# Altium PCB PCBB_BUZZ.PcbDoc
Units mil, origin at the board's own origin, x right, y up, seen from the top; angles counter-clockwise.
Board outline 6000 x 4000 mil, 2 copper layers (Top Layer, Bottom Layer); 9 components, 7 nets, 26 pads, 0 vias.
Unrouted connection lines stored in the file: 18.
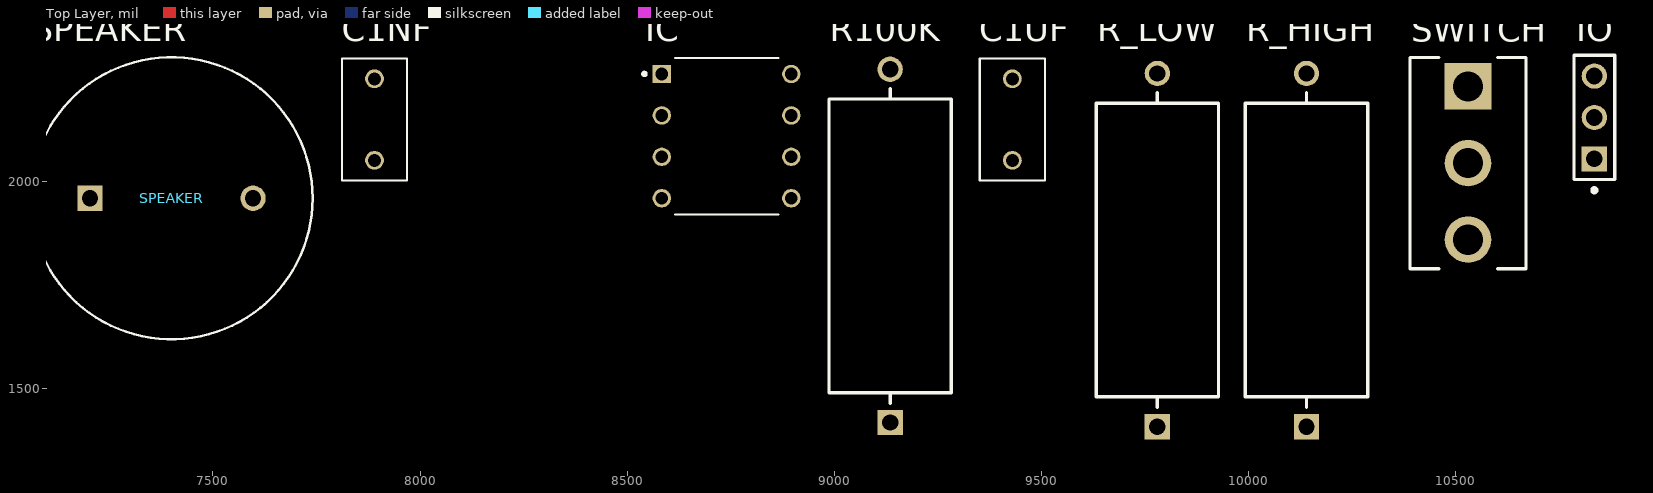
[diagram p0: Top Layer view]
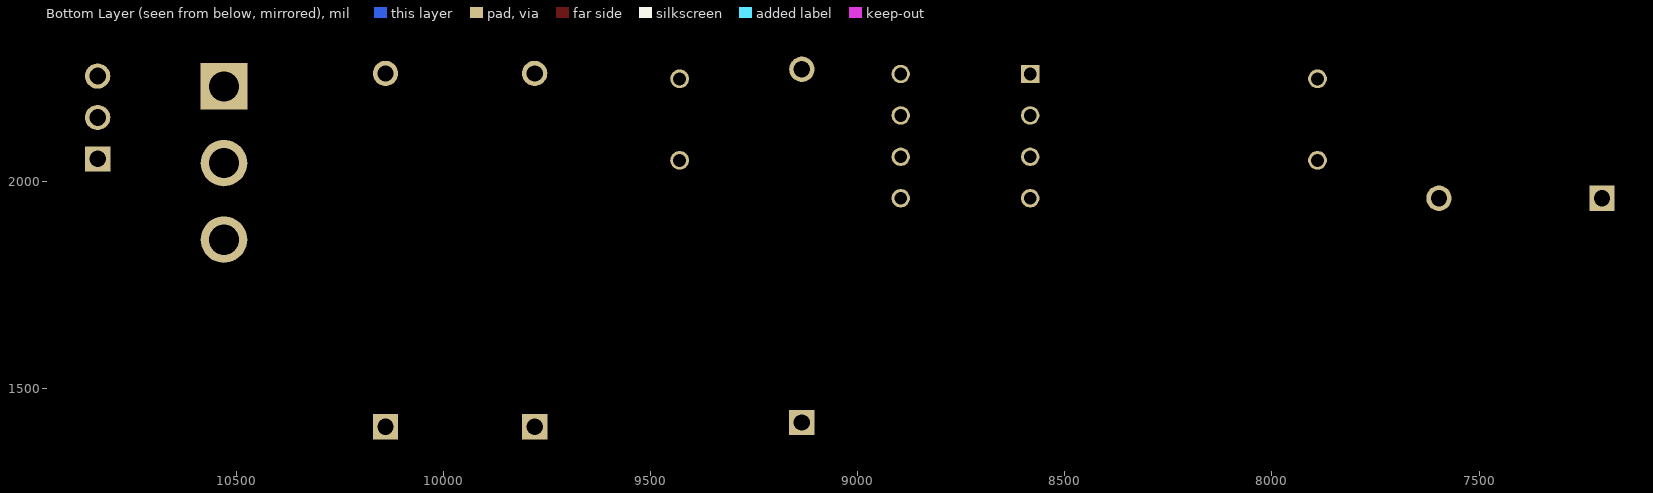
[diagram p1: Bottom Layer view, seen from below]

## Layer stack, top to bottom
Top Solder: solder mask 0.4, Solder Resist, Dk 3.5
Top Layer: signal copper 1.4
Dielectric 1: dielectric 12.6, FR-4, Dk 4.8
Bottom Layer: signal copper 1.4
Bottom Solder: solder mask 0.4, Solder Resist, Dk 3.5

## Board outline
1000,1000 7000,1000 7000,5000 1000,5000

## Design rules (kind name [scope] priority, off if disabled: settings)
Clearance [All] p1: gap=10 ignorepadtopadclearanceinfootprint=FALSE except(0: Arc-Hole Track-Hole SMDPad-Hole THPad-Hole Via-Hole Fill-Hole Poly-Hole Region-Hole Text-Hole)
PolygonConnect [All] p1: connectstyle=Relief reliefconductorwidth=10 reliefentries=4 polygonreliefangle="90 Angle" airgapwidth=10
RoomDefinition SCHE_BUZZ [InComponentClass('SCHE_BUZZ')] p1: confinementstyle=ConfineIn formatcopy=TRUE lockcomponents=FALSE outline 7045,1065 10900,1065 10900,2415 7045,2415
RoutingVias [All] p1: holewidth=28 width=50 viastyle="Through Hole" minholewidth=28 minwidth=50 maxholewidth=28 maxwidth=50
SolderMaskExpansion [All] p1: expansion=4 istentingtop=FALSE
Width [All] p1: maxlimit=10 minlimit=10 preferedwidth=10
30 further rules are at their usual default settings.

## Components (designator, comment, footprint, x,y, rotation, side; value= is the part's Value field where it differs from the comment)
C1NF "1n" CAPRB500W50L750T400H800 7890,2150 r90 top
C1UF "1u" CAPRB500W50L750T400H800 9430,2150 r90 top
IC "NE555P" DIP794W45P254L959H508Q8 8740,2110 r0 top
IO "22-28-4033" MOLX-22-28-4033_V 10835,2155 r90 top
R100K "100K" FP-AC05000003909JAC00-0 9135,1845 r90 top value=39Ω
R_HIGH "499K" FP-AC05000003909JAC00-0 10140,1835 r90 top value=39Ω
R_LOW "100K" FP-AC05000003909JAC00-0 9780,1835 r90 top value=39Ω
SPEAKER "PS1720P02" FP-PS1720P02-MFG 7400,1960 r0 top
SWITCH "A101SYCB04" FP-A101SYCB04-MFG 10530,2045 r0 top

## Footprints (in the part's own frame and the unit in brackets; to place one, negate y for a bottom-side part, rotate by r counter-clockwise, add the part's x,y. Pads: shape width x height; smd on the part's side, far side on the other; paste and mask are expansions set on the pad)
CAPRB500W50L750T400H800 [mm]
  round 1.15 hole 0.8: 1(-2.5,0) 2(2.5,0)
  silkscreen extent -3.75,-2 3.75,2
DIP794W45P254L959H508Q8 [mm]
  rect 1.13x1.13 hole 0.78: 1(-3.97,3.81)
  round 1.13 hole 0.78: 2(-3.97,1.27) 3(-3.97,-1.27) 4(-3.97,-3.81) 5(3.97,-3.81) 6(3.97,-1.27) 7(3.97,1.27) 8(3.97,3.81)
  silkscreen extent -5.13,-4.79 3.17,4.79
FP-A101SYCB04-MFG [mil]
  rect 112.37x112.37 hole 73 paste-39370.1 mask+0: 1(0,185)
  round 112.37 hole 73 paste-39370.1 mask+0: 2(0,0) 3(0,-185)
  silkscreen extent -140,-255 140,255, body extent -144,-259 144,259, height 10
FP-AC05000003909JAC00-0 [mm]
  rect 1.55x1.55 hole 1 paste-1000 mask+0: 1(-10.83,0)
  round 1.55 hole 1 paste-1000 mask+0: 2(10.83,0)
  silkscreen extent -9.65,-3.75 9.65,3.75, body extent -11.71,-3.85 11.71,3.85, height 0.25
FP-PS1720P02-MFG [mm]
  rect 1.55x1.55 hole 1 paste-1000 mask+0: 1(-5,0)
  round 1.55 hole 1 paste-1000 mask+0: 2(5,0)
  silkscreen extent -8.65,-8.65 8.65,8.65, body extent -8.75,-8.75 8.75,8.75, height 0.25
MOLX-22-28-4033_V [mm] "THD, 3-Leads, Body 7.62x2.49mm, Pitch 2.54mm"
  rect 1.55x1.55 hole 1.02: 1(-2.54,0)
  round 1.55 hole 1.02: 2(0,0) 3(2.54,0)
  silkscreen extent -4.58,-1.24 3.81,1.24, body extent -3.81,-1.24 3.81,1.24, height 8.38

## Part data
C1NF: library part FK22X7R2A105KN000, Package=None, Check_prices=https://www.snapeda.com/parts/FK22X7R2A105KN000/TDK/view-part/?ref=eda, Digi-Key_Part_Number=445-FK22X7R2A105KN000-ND, MF=TDK, MP=FK22X7R2A105KN000, Purchase-URL=https://pricing.snapeda.com/search/part/FK22X7R2A105KN000/?ref=eda, SnapEDA_Link=https://www.snapeda.com/parts/FK22X7R2A105KN000/TDK/view-part/?ref=snap
C1UF: library part FK22X7R2A105KN000, "Cap Ceramic 1uF 100V X7R 10% Radial 5mm 125Â°C Tape and Box", Package=None, Check_prices=https://www.snapeda.com/parts/FK22X7R2A105KN000/TDK/view-part/?ref=eda, Digi-Key_Part_Number=445-FK22X7R2A105KN000-ND, MF=TDK, MP=FK22X7R2A105KN000, Purchase-URL=https://pricing.snapeda.com/search/part/FK22X7R2A105KN000/?ref=eda, SnapEDA_Link=https://www.snapeda.com/parts/FK22X7R2A105KN000/TDK/view-part/?ref=snap
IC: Package=None, Availability=Unavailable, MP=NE555P, Price=None
IO: library part CMP-1676-00001-5, "Male Header, Pitch 2.54 mm, 1 x 3 Position, Height 8.38 mm, Tail Length 3.18 mm, RoHS, Bulk", Colour=Black, Current Rating="4 A", Manufacturer=Molex, Max Operating Temperature="75 degC", Min Operating Temperature="0 degC", Package Quantity=1, Voltage Rating="250 V", ComponentLink1Description="Manufacturer URL", ComponentLink1URL=http://www.molex.com/, ComponentLink2Description=Datasheet, ComponentLink2URL=http://www.molex.com/pdm_docs/sd/022284033_sd.pdf, Contact Finish=Gold, Contact Material=Brass, Contact Plating=Gold, DatasheetVersion="Rev. G, 01/2012", Height="8.38 mm", Lead Pitch="0.1 inch", Length="7.62 mm", Mount="Through Hole", Mounting Technology="Through Hole", PackageDescription="Male Header, Pitch 2.54 mm, 1 x 3 Position, Height 8.38 mm, Tail Length 3.18 mm", PackageReference=22-28-4033, Packaging=Bulk, Pins=3, REACH SVHC=Unknown, RoHSCompliant=true, Rows=1
R100K R_HIGH R_LOW: library part CMP-02408-000001-1, Manufacturer=Vishay, Manufacturer Part Number=AC05000003909JAC00, Package=0, Power Rating=5W, Resistance=39Ω, Temperature="-55°C to +250°C", Temperature Range High=+250°C, Temperature Range Low=-55°C, Tolerance=5%, Automotive=No, Automotive Grade=NA, Category=Res, ComponentLink2Description=Datasheet, ComponentLink2URL=http://www.vishay.com/docs/28730/acac-at.pdf, Composition=Wirewound, Device Class L1="Passive Components", Device Class L2=Resistors, Device Class L3="Through-Hole Resistors", Digikey Description="RES 39 OHM 5W 5% AXIAL", Height=7.5mm, Ipc Land Pattern Name=RESAD2166W100L1800D750, Lead Free=Yes, Mouser Description="Res Wirewound 39 Ohm 5% 5W -80ppm/°C to -10ppm/°C Conformal AXL Thru-Hole Ammo Pack", Octopart=https://octopart.com/ac05000003909jac00-vishay-39746279, RoHS=TRUE, Series=AC
SPEAKER: library part CMP-08413-000001-1, "AUDIO PIEZO TRANSDUCER 30V TH", Frequency=2kHz, Manufacturer="TDK Corporation", Package=0, Temperature="-10°C to +70°C", Temperature Range High=+70°C, Temperature Range Low=-10°C, Automotive=No, Category=Speak, ComponentLink2Description=Datasheet, ComponentLink2URL=https://product.tdk.com/info/en/catalog/datasheets/piezoelectronic_buzzer_ps_en.pdf, Device Class L1=Electromechanical, Device Class L2="Audio Products", Device Class L3=Buzzers, Digikey Description="AUDIO PIEZO TRANSDUCER 30V TH", Height=8.3mm, Lead Free=Yes, Manufacturer Part Number=PS1720P02, Mouser Description="Audio Indicators & Alerts Round 17mmx8mm 2 kHz Vin=3V", Octopart=https://octopart.com/ps1720p02-tdk-154429, RoHS=TRUE, Standoff Height=0.5mm
SWITCH: library part CMP-03408-000017-1, "SWITCH TOGGLE SPDT 0.4VA 20V", Actuator Color=Chrome, Contact Current Rating=400mA, Contact Resistance=10mR, Flammability Rating="UL94 V-1", Insulation Resistance=30MR, Max Operating Temperature=85°C, Max Voltage Rating (AC)=20V, Min Operating Temperature=-30°C, Package Quantity=100, Power Rating=400mW, Actuator Length=10.41mm, Actuator Material=Phenolic, Actuator Type="Standard Round", Contact Material=Copper, Contact Plating=Gold, Depth=6.86mm, Electrical Life=6000Cycles, ELV=Compliant, Illumination Type=Non-Illuminated, Lead Free="Lead Free", Max Voltage Rating (DC)=20V, Mount=Panel, Number of Poles=1, Number of Positions=2, Orientation=Straight, Packaging=Bulk, Radiation Hardening=No, REACH SVHC="No SVHC", RoHS Compliant=Yes, Series="Gemini A", Switch Function=On-On, Termination="PC Pins", Throw Configuration=SPDT, Voltage Rating (AC)=20V, Voltage Rating (DC)=20V

## Nets (pads, with @x,y where several pads share a name; then routed paths per layer and width w, separated by ;. In a path a pad name is that pad's centre, name@x,y a point inside that pad or via, vN(x,y) a via of type N, cw(c..) or ccw(c..) an arc to the next point about the centre after c; other vN are vias at no path point)
NetC1NF_1: C1NF.1 IC.2 IC.6 R100K.2
NetC1NF_2: C1NF.2 C1UF.2 IC.1 IO.1 SPEAKER.2
NetC1UF_1: C1UF.1 IC.4 IC.8 IO.3 SWITCH.2
NetIC_3: IC.3 IO.2 SPEAKER.1
NetIC_7: IC.7 R100K.1 R_HIGH.2 R_LOW.2
NetR_HIGH_1: R_HIGH.1 SWITCH.1
NetR_LOW_1: R_LOW.1 SWITCH.3
pads on no net: IC.5